# Altium PCB Stethoscope.PcbDoc
Units mm, origin at the board's own origin, x right, y up, seen from the top; angles counter-clockwise.
Board outline 100 x 84.5 mm, 2 copper layers (Top Layer, Bottom Layer); 74 components, 66 nets, 381 pads, 111 vias.
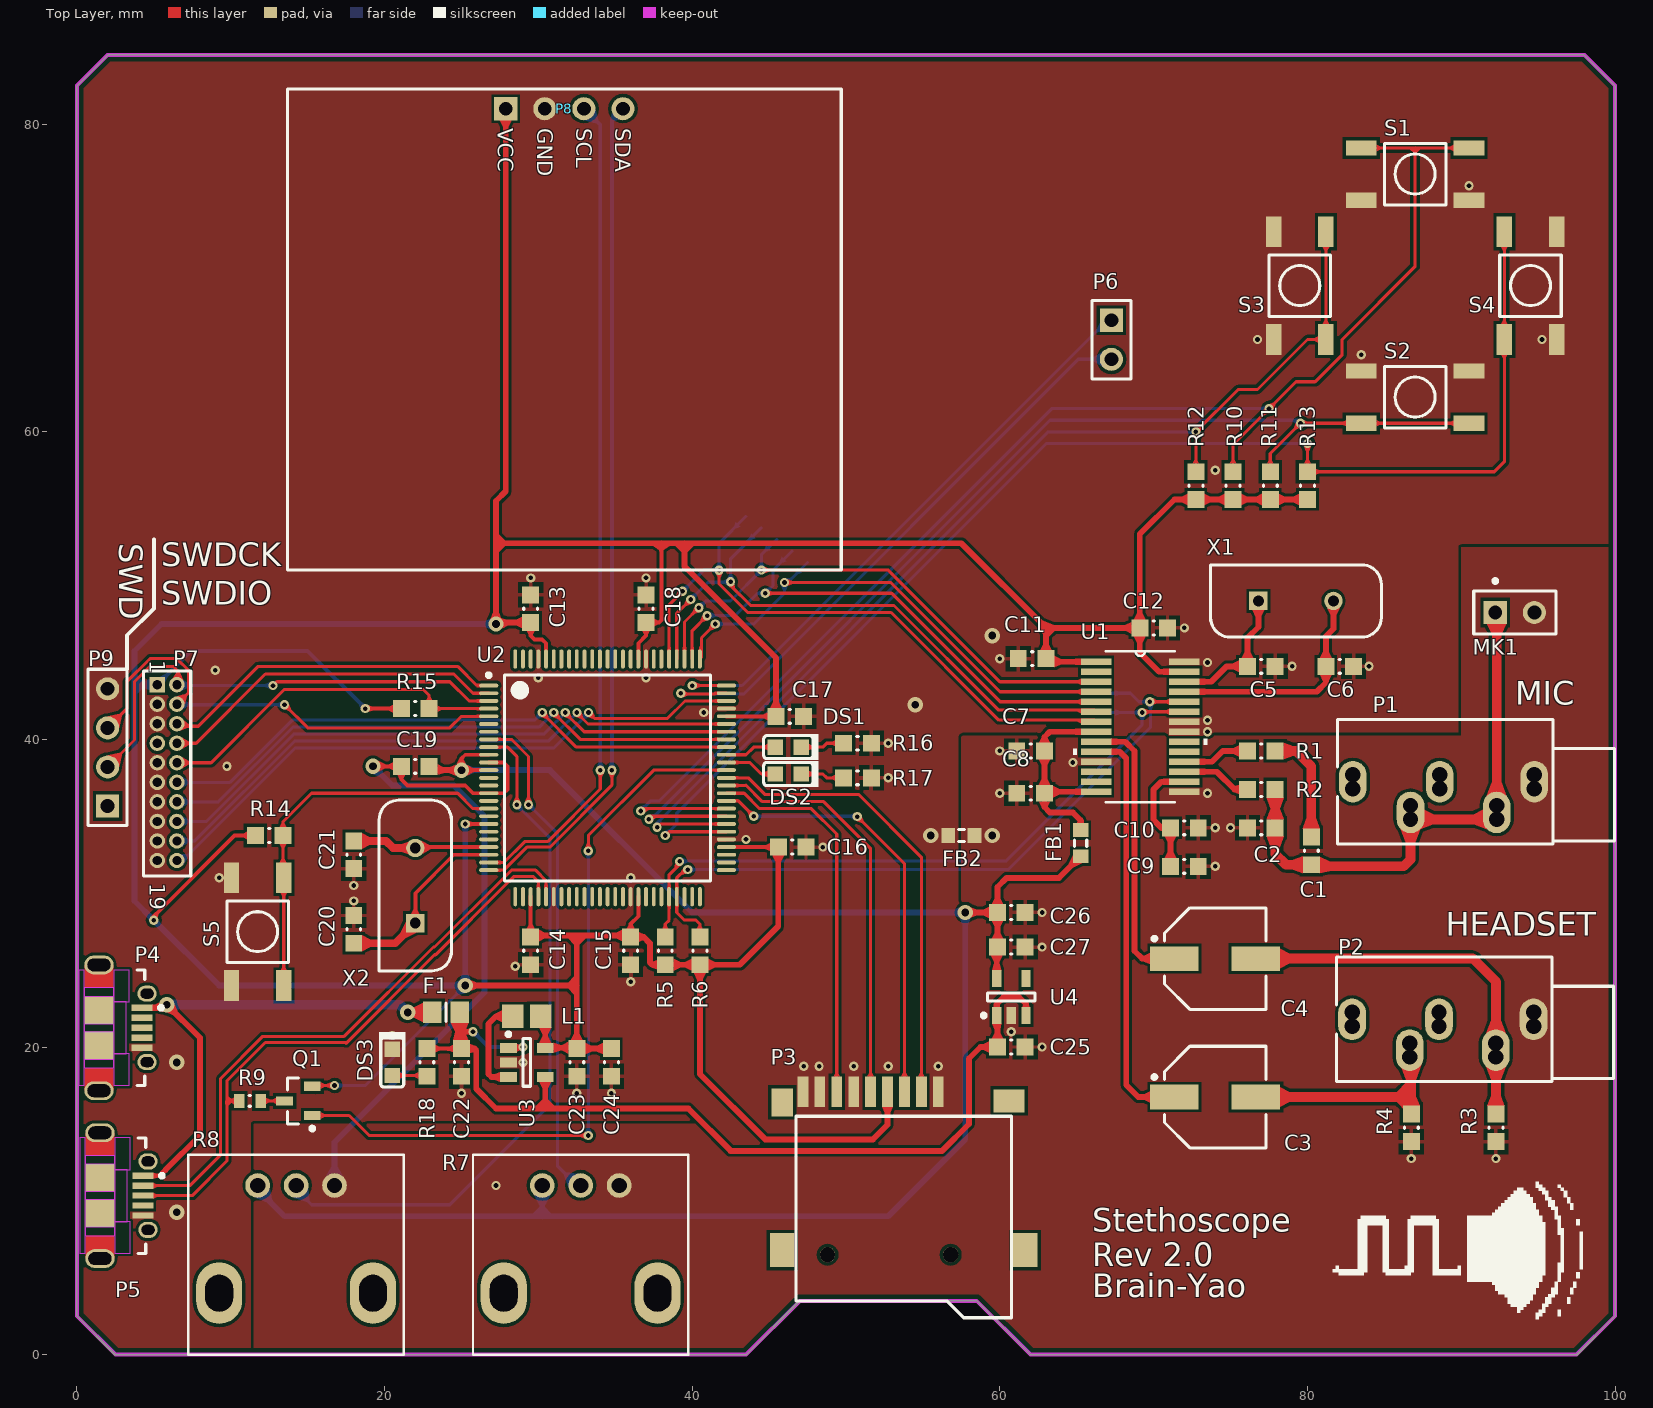
[diagram p0: Top Layer view]
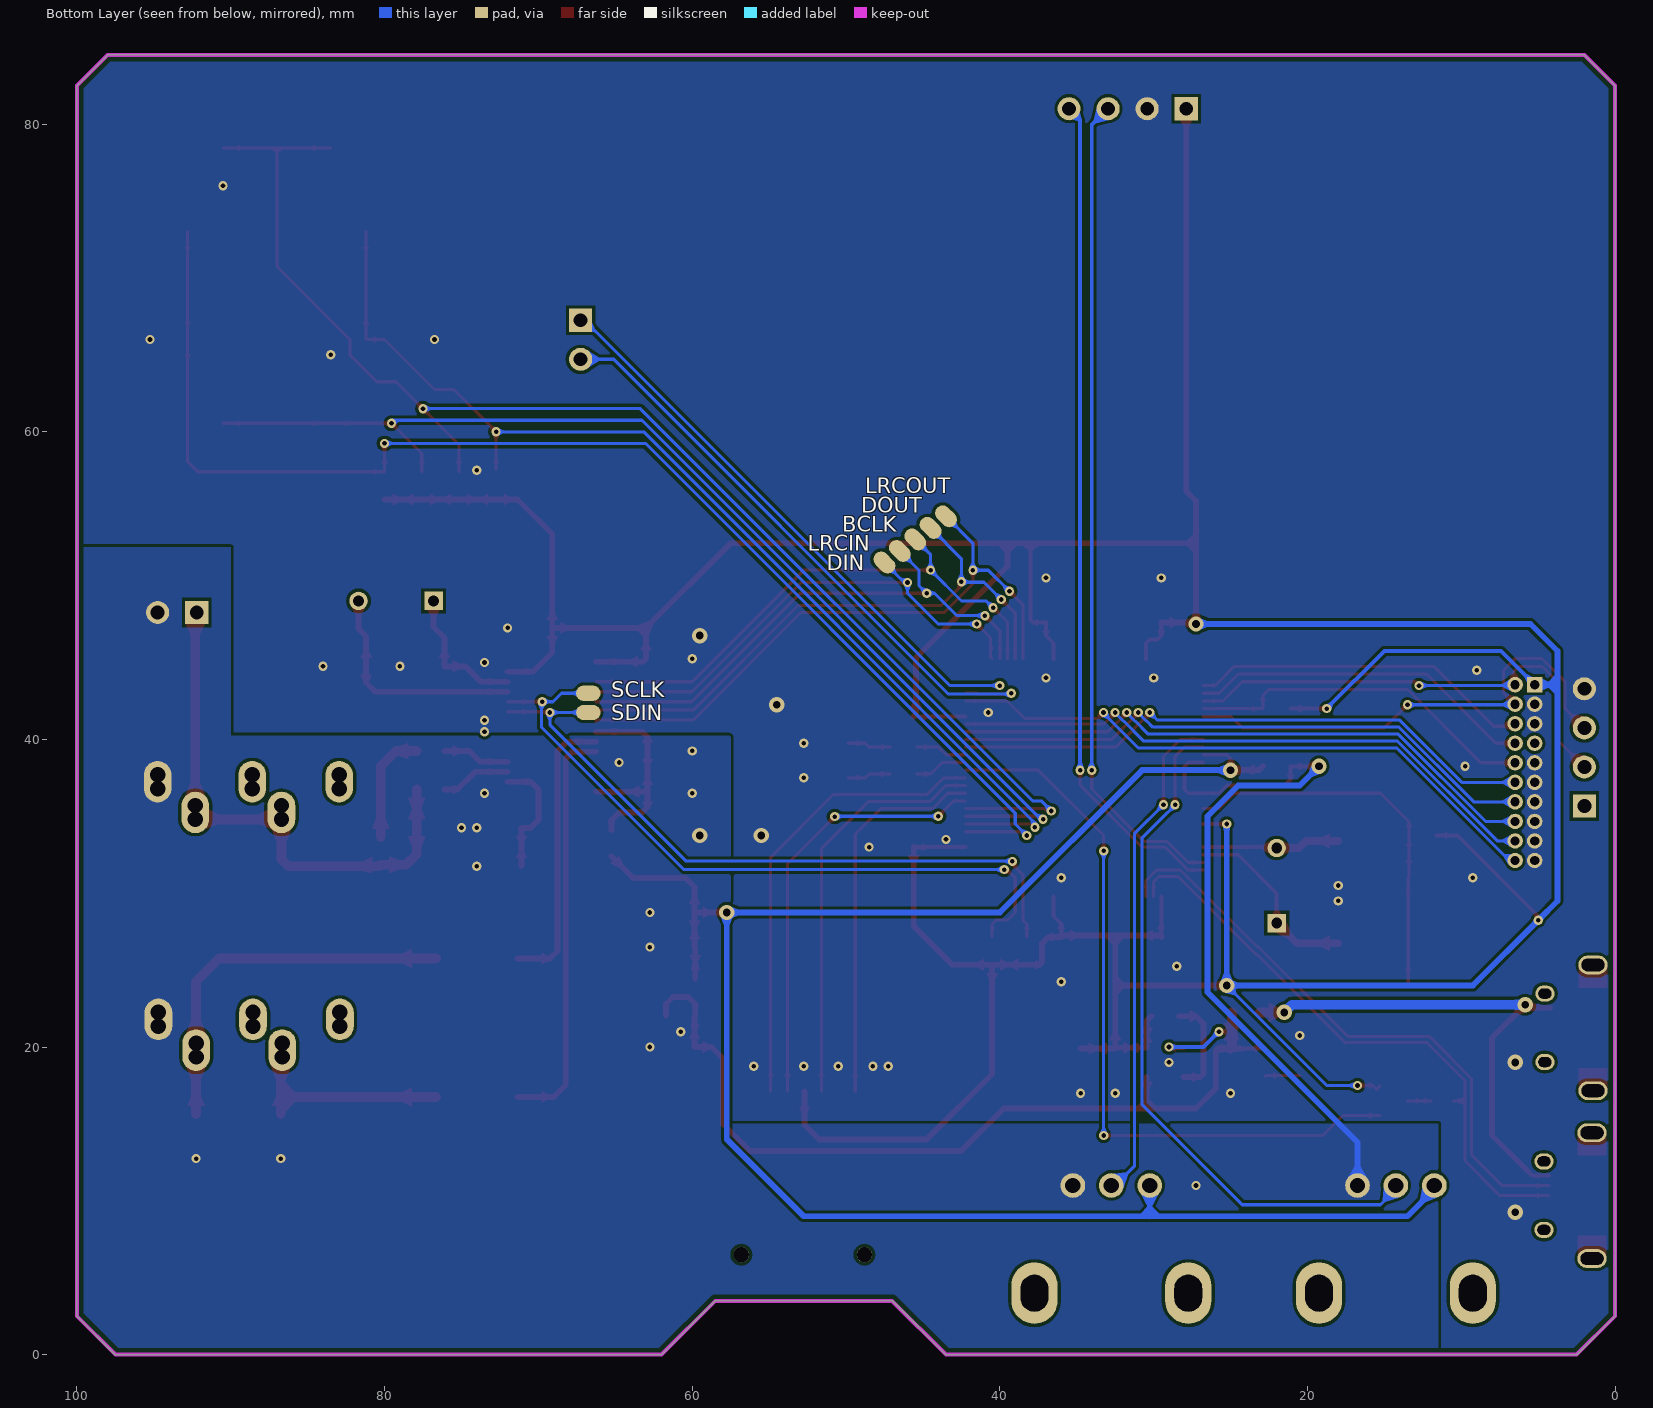
[diagram p1: Bottom Layer view, seen from below]

## Layer stack, top to bottom
Top Solder: solder mask 0.0102, Solder Resist, Dk 3.5
Top Layer: signal copper 0.0356
Dielectric 1: dielectric 0.32, FR-4, Dk 4.8
Bottom Layer: signal copper 0.0356
Bottom Solder: solder mask 0.0102, Solder Resist, Dk 3.5

## Board outline
0,2.5 2.5,0 43.5,0 47,3.5 58.5,3.5 62,0 97.5,0 100,2.5 100,82.5 98,84.5 2,84.5 0,82.5

## Design rules (kind name [scope] priority, off if disabled: settings)
Clearance Clearance_Edge [OnLayer('Keep-Out Layer')] p1: gap=0.3
Clearance Clearance_Poly [InPolygon] p2: gap=0.2
Clearance [All] p3: gap=0.152
DiffPairsRouting [All] p1: maxlimit=0.381 minlimit=0.152 mostfreqgap=0.2 toplayer_minwidth=0.2 toplayer_maxwidth=0.381 toplayer_prefwidth=0.3 bottomlayer_minwidth=0.2 bottomlayer_maxwidth=0.381 bottomlayer_prefwidth=0.3 maxuncoupledlength=12.7
HoleSize [All] p1: absolutevalues=TRUE maxlimit=6.5 minlimit=0.3 maxpercent=80.000 minpercent=20.000
HoleToHoleClearance [All] p1: gap=0.152 allowstackedmicrovias=TRUE
MinimumSolderMaskSliver [All] p1: minsoldermaskwidth=0.1
PolygonConnect PolygonConnect_2 [IsVia] p1: connectstyle=Direct reliefconductorwidth=0.254 reliefentries=4 polygonreliefangle="90 Angle" airgapwidth=0.254
PolygonConnect PolygonConnect_1 [(HasFootprint('CAPC0603(1608)100_M') OR HasFootprint('RESC0603(1608)_M'))] p2: connectstyle=Relief reliefconductorwidth=0.254 reliefentries=4 polygonreliefangle="90 Angle" airgapwidth=0.254
PolygonConnect [All] p3: connectstyle=Direct reliefconductorwidth=0.254 reliefentries=4 polygonreliefangle="90 Angle" airgapwidth=0.254
RoomDefinition Codec [InComponentClass('Codec')] p1: confinementstyle=ConfineIn formatcopy=TRUE lockcomponents=FALSE outline 45.5,-9 58.5,-9 58.5,-2 45.5,-2
RoomDefinition Power [InComponentClass('Power')] p2: confinementstyle=ConfineIn formatcopy=TRUE lockcomponents=FALSE outline 59.75,-9.099 68.542,-9.099 68.542,-2.5 59.75,-2.5
RoomDefinition MCU [InComponentClass('MCU')] p3: confinementstyle=ConfineIn formatcopy=TRUE lockcomponents=FALSE outline 33.5,-10.75 44,-10.75 44,-1.75 33.5,-1.75
RoutingVias [All] p1: holewidth=0.3 width=0.6 viastyle="Through Hole" minholewidth=0.3 minwidth=0.6 maxholewidth=0.6 maxwidth=1.2
SilkToSolderMaskClearance [IsPad] p1: minsilkscreentomaskgap=0.152 clearancetoexposedcopper=TRUE
SolderMaskExpansion [All] p1: expansion=0.102
Width [All] p1: maxlimit=1.5 minlimit=0.152 preferedwidth=0.254
25 further rules are at their usual default settings.

## Classes and differential pairs
component class Power: C22 C23 C24 C25 C26 C27 DS3 FB2 L1 R18 U3 U4
component class MCU: C13 C14 C15 C16 C17 C18 C19 C20 C21 DS1 DS2 F1 P3 P4 P6 P7 P8 P9 Q1 R5 R6 R7 R8 R10 R11 R12 R13 R14 R15 R16 R17 R18 S1 S2 S3 S4 S5 U2 X2
component class Codec: C1 C2 C3 C4 C5 C6 C7 C8 C9 C10 C11 C12 FB1 MK1 P1 P2 R1 R2 R3 R4 U1 X1
differential pair USB: +USB_P -USB_N

## Components (designator, comment, footprint, x,y, rotation, side; value= is the part's Value field where it differs from the comment)
C1 "1uF 16V" CAPC0603(1608)100_M 80.25,32.75 r90 top
C2 "47pF 16V" CAPC0603(1608)100_M 77,34.25 r0 top
C3 "100uF 16V" HONOR_63X54 74,16.75 r0 top
C4 "100uF 16V" HONOR_63X54 74,25.75 r0 top
C5 "20pF 16V" CAPC0603(1608)100_M 77,44.75 r180 top
C6 "20pF 16V" CAPC0603(1608)100_M 82.1,44.75 r180 top
C7 "100nF 16V" CAPC0603(1608)100_M 62,39.25 r0 top
C8 "100nF 16V" CAPC0603(1608)100_M 62,36.5 r0 top
C9 "100nF 16V" CAPC0603(1608)100_M 72,31.75 r180 top
C10 "10uF 6.3V" CAPC0603(1608)100_M 72,34.25 r180 top
C11 "100nF 16V" CAPC0603(1608)100_M 62.1,45.25 r0 top
C12 "100nF 16V" CAPC0603(1608)100_M 70,47.25 r180 top
C13 "100nF" CAPC0603(1608)100_M 29.5,48.5 r270 top
C14 "100nF" CAPC0603(1608)100_M 29.5,26.25 r90 top
C15 "100nF" CAPC0603(1608)100_M 36,26.25 r90 top
C16 "100nF" CAPC0603(1608)100_M 46.5,33 r180 top
C17 "100nF" CAPC0603(1608)100_M 46.35,41.5 r180 top
C18 "100nF" CAPC0603(1608)100_M 37,48.5 r270 top
C19 "100nF" CAPC0603(1608)100_M 22,38.25 r0 top
C20 "30pF 10V" CAPC0603(1608)100_M 18,27.65 r270 top
C21 "30pF 10V" CAPC0603(1608)100_M 18,32.5 r90 top
C22 "10uF 10V" CAPC0603(1608)100_M 25,19 r90 top
C23 "10uF 10V" CAPC0603(1608)100_M 32.5,19 r90 top
C24 "100nF 16V" CAPC0603(1608)100_M 34.75,19 r90 top
C25 "10uF 10V" CAPC0603(1608)100_M 60.75,20 r180 top
C26 "10uF 10V" CAPC0603(1608)100_M 60.75,28.75 r180 top
C27 "100nF 16V" CAPC0603(1608)100_M 60.75,26.5 r180 top
DS1 "LED" KING-0603LED_GREEN_V 46.25,39.5 r180 top
DS2 "LED" KING-0603LED_ORANGE_V 46.25,37.75 r180 top
DS3 "LED" KING-0603LED_GREEN_V 20.5,19 r270 top
F1 "Polysilicon fuse" RESC2012N 24,22.25 r0 top
FB1 "120R@100MHz" RESC1608N 65.25,33.25 r270 top
FB2 "120R@100MHz" RESC1608N 57.5,33.754 r180 top
L1 "3.3uH" INDC2012N 29.25,22 r0 top
MK1 "Mic2" PIN2 92.21,48.25 r0 top
P1 "MIC" ST-3150-5N 99.95,36.4 r270 top
P2 "EarPhone" ST-3150-5N 99.9,20.95 r270 top
P3 "TF-Card" Micro_TF_01A 53.75,6.5 r270 top
P4 "Micro USB" HIRO-ZX62D-AB-5P8_V 3,21.25 r270 top
P5 "Micro USB" HIRO-ZX62D-AB-5P8_V 3.062,10.338 r270 top
P6 "Header 2" HDR1X2 67.25,67.25 r270 top
P7 "MHDR2X10" MHDR2X10 5.23,43.56 r270 top
P8 "OLED" OLED 31.69,81 r0 top
P9 "Header 4" HDR1X4 2,35.67 r90 top
Q1 "BSS84" NXP-SOT23_L 14.4,16.5 r180 top
R1 "0" RESC0603(1608)_M 77,39.25 r180 top
R2 "2K2 1%" RESC0603(1608)_M 77,36.75 r180 top
R3 "100K 1%" RESC0603(1608)_M 92.25,14.75 r90 top
R4 "100K 1%" RESC0603(1608)_M 86.75,14.75 r90 top
R5 "2K2 5%" RESC0603(1608)_M 38.25,26.25 r270 top
R6 "2K2 5%" RESC0603(1608)_M 40.5,26.25 r270 top
R7 "RPot" R09 32.75,4 r180 top
R8 "RPot" R09 14.25,4 r180 top
R9 "1K5 5%" RESC0603(1608)_L 11.25,16.5 r180 top
R10 "10K 1%" RESC0603(1608)_M 75.167,56.5 r270 top
R11 "10K 1%" RESC0603(1608)_M 77.583,56.5 r270 top
R12 "10K 1%" RESC0603(1608)_M 72.75,56.5 r270 top
R13 "10K 1%" RESC0603(1608)_M 80,56.5 r270 top
R14 "10K 5%" RESC0603(1608)_M 12.5,33.75 r180 top
R15 "10K 5%" RESC0603(1608)_M 22,42 r180 top
R16 "47R 5%" RESC0603(1608)_M 50.75,39.75 r180 top
R17 "47R 5%" RESC0603(1608)_M 50.75,37.5 r180 top
R18 "100R 5%" RESC0603(1608)_M 22.75,19 r90 top
S1 "SW-PB" 4x4_switch 87,76.75 r180 top
S2 "SW-PB" 4x4_switch 87,62.25 r0 top
S3 "SW-PB" 4x4_switch 79.5,69.5 r90 top
S4 "SW-PB" 4x4_switch 94.5,69.5 r270 top
S5 "SW-PB" 4x4_switch 11.75,27.5 r270 top
U1 "TLV320AIC23B" PW28 69.13,40.825 r0 top
U2 "LPC1768FBD100" SOT407-1_L 34.5,37.5 r0 top
U3 "RT8008-33" SOT23-5AN 29.25,19 r0 top
U4 "TPS76333DBVRG4" TI-DBV5_N 60.75,23.25 r90 top
X1 "12.288MHz ±20ppm 20pF" 49S 79.25,49 r180 top
X2 "12M" 49S 22,30.5 r270 top

## Footprints (in the part's own frame and the unit in brackets; to place one, negate y for a bottom-side part, rotate by r counter-clockwise, add the part's x,y. Pads: shape width x height; smd on the part's side, far side on the other; paste and mask are expansions set on the pad)
4x4_switch [mm] "4x4_switch"
  rect 2x1 smd: 1(-3.5,1.7) 1(3.5,1.7) 2(-3.5,-1.7) 2(3.5,-1.7)
  silkscreen extent -2,-2 2,2, body extent -2,-2 2,2, height 2
49S [mm]
  rect 1.2x1.2 hole 0.7: 1(2.44,0)
  round 1.2 hole 0.7: 2(-2.44,0)
  silkscreen extent -5.55,-2.35 5.55,2.35
CAPC0603(1608)100_M [mm] "Chip Capacitor, Body 1.6x0.8mm, Height 1.0mm, IPC Low Density"
  rect 1.1x1.1 smd: 1(-0.9,0) 2(0.9,0)
  silkscreen extent -0.05,-0.45 0.05,0.45, body extent -0.87,-0.47 0.88,0.48, height 1
HDR1X2 [mm] "Connector; Header; 2 Position"
  rect 1.5x1.5 hole 0.9: 1(0,0)
  round 1.5 hole 0.9: 2(2.54,0)
  silkscreen extent -1.27,-1.27 3.81,1.27
HDR1X4 [mm] "Connector; Header; 4 Position"
  rect 1.5x1.5 hole 0.9: 1(0,0)
  round 1.5 hole 0.9: 2(2.54,0) 3(5.08,0) 4(7.62,0)
  silkscreen extent -1.27,-1.27 8.89,1.27
HIRO-ZX62D-AB-5P8_V [mm] "USB Micro-AB Connector, 5-Leads, Pitch 0.65mm"
  rect 0.4x1.35 smd: 1(-1.3,1.238) 2(-0.65,1.238) 3(0,1.238) 4(0.65,1.238) 5(1.3,1.238)
  oval 1.05x1.25 hole 0.65 slot 0.85 at 90 deg: 6(2.225,1.563) 11(-2.225,1.563)
  oval 1.225x1.9 hole 0.825 slot 1.5 at 90 deg: 7(4.088,-1.562) 10(-4.088,-1.562)
  rect 1.8x1.9 smd: 8(1.15,-1.562) 9(-1.15,-1.562)
  Top Layer region: -4.088,-2.513 -2.6,-2.513 -2.6,-0.613 -4.088,-0.613
  Top Layer region: 2.6,-2.512 4.088,-2.512 4.088,-0.612 2.6,-0.612
  Top Layer keep-out region: 2.59,-0.602 2.06,-0.602 2.06,-2.522 2.59,-2.522
  Top Layer keep-out region: -0.24,-2.522 0.24,-2.522 0.24,-0.602 -0.24,-0.602
  Top Layer keep-out region: -2.59,-2.522 -2.06,-2.522 -2.06,-0.602 -2.59,-0.602
  Top Layer keep-out region: -3.75,-2.887 3.75,-2.887 3.75,-2.523 -3.75,-2.523
  Top Layer keep-out region: 1.7,-0.603 3.75,-0.603 3.75,0.413 1.7,0.413
  Top Layer keep-out region: -1.7,-0.602 1.7,-0.602 1.7,0.213 -1.7,0.213
  Top Layer keep-out region: -3.75,-0.602 -1.7,-0.602 -1.7,0.413 -3.75,0.413
  silkscreen extent -3.75,0.91 3.75,2.59, body extent -4.37,-4.19 4.37,1.86, height 2.83
HONOR_63X54 [mm]
  rect 3.15x1.6 smd: 1(-2.65,0) 2(2.65,0)
  silkscreen extent -4.07,-3.3 3.3,3.3
INDC2012N [mm] "Chip Inductor, Body 2.0x1.2mm, IPC Medium Density"
  rect 1.4x1.5 smd: 1(-0.9,0) 2(0.9,0)
  body extent -1.1,-0.7 1.1,0.7, height 1.1
KING-0603LED_GREEN_V [mm] "SMT LED, 2-Leads, Body 1.6x0.8mm (0603-Size)"
  rect 1x1 smd paste+0 mask+0: 1(0.85,0) 2(-0.85,0)
  silkscreen extent -1.97,-0.85 1.6,0.85, body extent -0.92,-0.53 1.09,0.53, height 1.1
KING-0603LED_ORANGE_V [mm] "SMT LED, 2-Leads, Body 1.6x0.8mm (0603-Size)"
  rect 1x1 smd paste+0 mask+0: 1(0.85,0) 2(-0.85,0)
  silkscreen extent -1.97,-0.85 1.6,0.85, body extent -0.92,-0.53 1.09,0.53, height 1.1
MHDR2X10 [mm] "Connector; Header; 10x2 Position"
  rect 1x1 hole 0.6: 1(0,0)
  round 1 hole 0.6: 2(0,1.27) 3(1.27,0) 4(1.27,1.27) 5(2.54,0) 6(2.54,1.27) 7(3.81,0) 8(3.81,1.27) 9(5.08,0) 10(5.08,1.27) 11(6.35,0) 12(6.35,1.27) 13(7.62,0) 14(7.62,1.27) 15(8.89,0) 16(8.89,1.27) 17(10.16,0) 18(10.16,1.27) 19(11.43,0) 20(11.43,1.27)
  silkscreen extent -0.9,-0.9 12.43,2.17
Micro_TF_01A [mm]
  rect 1.5x2 smd: 0(-10,6.85)
  rect 1.8x1.4 smd: 0(-9.9,-7.9)
  rect 2.2x1.6 smd: 0(-0.3,7.9) 0(-0.3,-7.9)
  round 1 hole 1 unplated: 0(0,3.05) 0(0,-4.95)
  rect 2x0.7 smd: 1(-10.6,2.25) 2(-10.6,1.15) 3(-10.6,0.05) 4(-10.6,-1.05) 5(-10.6,-2.15) 6(-10.6,-3.25) 7(-10.6,-4.35) 8(-10.6,-5.45) 9(-10.6,-6.55)
  silkscreen extent -9,-7 4.1,7, body extent -11.11,-8.15 6.45,8.15, height 2.04
NXP-SOT23_L [mm] "SOT23, 3-Leads, Body 3x1.4mm, Pitch 0.95mm, IPC High Density"
  rect 1.1x0.6 smd: 1(-0.9,0.95) 2(-0.9,-0.95) 3(0.9,0)
  silkscreen extent -1.03,-1.5 0.7,1.92, body extent -0.7,-1.5 0.7,1.5, height 1.1
OLED [mm]
  rect 1.5x1.5 hole 0.9: 1(-3.81,0)
  round 1.5 hole 0.9: 2(-1.27,0) 3(1.27,0) 4(3.81,0)
  silkscreen extent -18,-30 18,1.27
PIN2 [mm] "Photosensitive Diode; 2 Leads"
  rect 1.5x1.5 hole 0.9: 1(0,0)
  round 1.5 hole 0.9: 2(2.54,0)
  silkscreen extent -1.4,-1.4 3.94,2.17
PW28 [mil]
  rect 78x16 smd: 1(-113,166.34) 2(-113,140.75) 3(-113,115.16) 4(-113,89.57) 5(-113,63.98) 6(-113,38.39) 7(-113,12.8) 8(-113,-12.8) 9(-113,-38.39) 10(-113,-63.98) 11(-113,-89.57) 12(-113,-115.16) 13(-113,-140.75) 14(-113,-166.34) 15(113,-166.34) 16(113,-140.75) 17(113,-115.16) 18(113,-89.57) 19(113,-63.98) 20(113,-38.39) 21(113,-12.8) 22(113,12.8) 23(113,38.39) 24(113,63.98) 25(113,89.57) 26(113,115.16) 27(113,140.75) 28(113,166.34)
  silkscreen extent -172,-193 172,193
R09 [mm] "R -09 Insulated Shaft Rotary Potentiometer"
  oval 3x4 hole 1.8 slot 2.4 at 90 deg: 0(-5,0) 0(5,0)
  round 1.6 hole 1: 1(-2.5,-7) 2(2.5,-7) 3(0,-7)
  silkscreen extent -7,-9 7,4, body extent -5,-7 5,3, height 21.8
RESC0603(1608)_L [mm] "Chip Resistor, Body 1.6x0.8mm, IPC High Density"
  rect 0.7x0.9 smd: 1(-0.7,0) 2(0.7,0)
  silkscreen extent -0.05,-0.35 0.05,0.35, body extent -0.85,-0.47 0.85,0.47, height 0.6
RESC0603(1608)_M [mm] "Chip Resistor, Body 1.6x0.8mm, IPC Low Density"
  rect 1.1x1.1 smd: 1(-0.9,0) 2(0.9,0)
  silkscreen extent -0.05,-0.45 0.05,0.45, body extent -0.85,-0.47 0.85,0.47, height 0.6
RESC1608N [mm] "Chip Resistor, Body 1.6x0.8mm, IPC Medium Density"
  rect 0.9x1 smd: 1(-0.85,0) 2(0.85,0)
  silkscreen extent -0.2,-0.4 0.2,0.4, body extent -0.8,-0.4 0.8,0.4, height 0.6
RESC2012N [mm] "Chip Resistor, Body 2.0x1.3mm, IPC Medium Density"
  rect 1.2x1.4 smd: 1(-0.9,0) 2(0.9,0)
  silkscreen extent 0,-0.6 0,0.6, body extent -1,-0.6 1,0.6, height 0.95
SOT23-5AN [mm] "SOT23, 5-Leads, Body 2.9x1.6mm, Pitch 0.95mm, Lead Span 2.8mm, IPC Medium Density"
  rect 1.1x0.65 smd: 1(-1.2,0.95) 2(-1.2,0) 3(-1.2,-0.95) 4(1.2,-0.95) 5(1.2,0.95)
  silkscreen extent -1.32,-1.55 0.25,1.95, body extent -0.9,-1.55 0.9,1.55, height 1.45
SOT407-1_L [mm] "Thin QFP, 100-Leads, Body 14x14mm, Pitch 0.5mm, IPC High Density"
  oval 1.25x0.25 smd: 1(-7.725,6) 2(-7.725,5.5) 3(-7.725,5) 4(-7.725,4.5) 5(-7.725,4) 6(-7.725,3.5) 7(-7.725,3) 8(-7.725,2.5) 9(-7.725,2) 10(-7.725,1.5) 11(-7.725,1) 12(-7.725,0.5) 13(-7.725,0) 14(-7.725,-0.5) 15(-7.725,-1) 16(-7.725,-1.5) 17(-7.725,-2) 18(-7.725,-2.5) 19(-7.725,-3) 20(-7.725,-3.5) 21(-7.725,-4) 22(-7.725,-4.5) 23(-7.725,-5) 24(-7.725,-5.5) 25(-7.725,-6) 51(7.725,-6) 52(7.725,-5.5) 53(7.725,-5) 54(7.725,-4.5) 55(7.725,-4) 56(7.725,-3.5) 57(7.725,-3) 58(7.725,-2.5) 59(7.725,-2) 60(7.725,-1.5) 61(7.725,-1) 62(7.725,-0.5) 63(7.725,0) 64(7.725,0.5) 65(7.725,1) 66(7.725,1.5) 67(7.725,2) 68(7.725,2.5) 69(7.725,3) 70(7.725,3.5) 71(7.725,4) 72(7.725,4.5) 73(7.725,5) 74(7.725,5.5) 75(7.725,6)
  oval 0.25x1.25 smd: 26(-6,-7.725) 27(-5.5,-7.725) 28(-5,-7.725) 29(-4.5,-7.725) 30(-4,-7.725) 31(-3.5,-7.725) 32(-3,-7.725) 33(-2.5,-7.725) 34(-2,-7.725) 35(-1.5,-7.725) 36(-1,-7.725) 37(-0.5,-7.725) 38(0,-7.725) 39(0.5,-7.725) 40(1,-7.725) 41(1.5,-7.725) 42(2,-7.725) 43(2.5,-7.725) 44(3,-7.725) 45(3.5,-7.725) 46(4,-7.725) 47(4.5,-7.725) 48(5,-7.725) 49(5.5,-7.725) 50(6,-7.725) 76(6,7.725) 77(5.5,7.725) 78(5,7.725) 79(4.5,7.725) 80(4,7.725) 81(3.5,7.725) 82(3,7.725) 83(2.5,7.725) 84(2,7.725) 85(1.5,7.725) 86(1,7.725) 87(0.5,7.725) 88(0,7.725) 89(-0.5,7.725) 90(-1,7.725) 91(-1.5,7.725) 92(-2,7.725) 93(-2.5,7.725) 94(-3,7.725) 95(-3.5,7.725) 96(-4,7.725) 97(-4.5,7.725) 98(-5,7.725) 99(-5.5,7.725) 100(-6,7.725)
  silkscreen extent -7.85,-6.7 6.7,6.8, body extent -7,-7 7,7, height 1.6
ST-3150-5N [mm] "Connector; Stereo Jack, 3.5mm, 5 Position"
  oval 2.7x1.8 all layers, no hole: 1(-0.85,-5.2) 2(1.15,-7.65) 3(-0.85,-11.35) 4(1.15,-13.25) 5(-0.85,-17)
  round 1.2 hole 1: 1A(-1.3,-5.2) 1B(-0.4,-5.2) 2A(0.7,-7.65) 2B(1.6,-7.65) 3A(-1.3,-11.35) 3B(-0.4,-11.35) 4A(0.7,-13.25) 4B(1.6,-13.25) 5A(-1.3,-17) 5B(-0.4,-17)
  silkscreen extent -4.9,-18 3.2,0
TI-DBV5_N [mm] "SOT23, 5-Leads, Body 2.9x1.6mm, Pitch 0.95mm, IPC Medium Density"
  rect 1.1x0.6 smd: 1(-1.2,0.95) 2(-1.2,0) 3(-1.2,-0.95) 4(1.2,-0.95) 5(1.2,0.95)
  silkscreen extent -1.32,-1.55 0.25,1.92, body extent -0.87,-1.52 0.87,1.53, height 1.45

## Part data
C1: library part CMP-1035-02736-1, "CAP 1uF 16V ±5% 0603 (1608 Metric) Thickness 1mm SMD"
C2: library part CMP-1035-01051-1, "CAP 47pF 16V ±5% 0603 (1608 Metric) Thickness 1mm SMD"
C3 C4: library part "Cap Pol1", "Polarized Capacitor (Radial)"
C5 C6: library part CMP-1035-00768-1, "CAP 20pF 16V ±0.25pF 0603 (1608 Metric) Thickness 1mm SMD"
C7 C8 C9 C11 C12 C13 C14 C15 C16 C17 C18 C19 C24 C27: library part CMP-1035-02584-1, "CAP 100nF 16V ±10% 0603 (1608 Metric) Thickness 1mm SMD"
C10: library part CMP-1035-02796-1, "CAP 10uF 6.3V ±10% 0603 (1608 Metric) Thickness 1mm SMD"
C20 C21: library part CMP-1035-00901-1, "CAP 30pF 10V ±2% 0603 (1608 Metric) Thickness 1mm SMD"
C22 C23 C25 C26: library part CMP-1035-02799-1, "CAP 10uF 10V ±10% 0603 (1608 Metric) Thickness 1mm SMD"
DS1 DS3: library part CMP-0404-00001-1, "LED, SMT, 0603(1608), 1.1mm thickness, Green"
DS2: library part CMP-0404-00002-1, "LED, SMT, 0603(1608), 1.1mm thickness, Orange"
F1: library part "Fuse 2", "Polysilicon fuse 50mA"
FB1 FB2: library part Res2, "Resistor"
L1: library part Inductor, "Inductor"
MK1: "Microphone"
P1 P2: library part "Phonejack Stereo SW", "3-Conductor Jack with 2 break contacts (normals) and 2 auxiliary make contacts"
P4 P5: library part CMP-1349-00001-1, "USB 2.0 Standard Micro-USB Connector, Micro AB-Standard (Bottom Mount), 30 V AC, -30 to 85 degC, Right Angle, 5-Pin 7.5 x 5.6 x 2.8 mm SMD, RoHS, Reel"
P6: "Header, 2-Pin"
P7: "Header, 10-Pin, Dual row"
P8: library part "Header 4", "Header, 4-Pin"
P9: "Header, 4-Pin"
Q1: library part CMP-1258-00128-1, "P-Channel Enhancement Mode Vertical DMOS Transistor, -50 V, -0.13 A, 3-Pin SOT23, Tape and Reel"
R1: library part CMP-1012-00001-1, "Jumper 0603 (1608 Metric)"
R2: library part CMP-1012-00546-1, "2K2 0.1W 1% 0603 (1608 Metric)  SMD"
R3 R4: library part CMP-1012-00736-1, "100K 0.1W 1% 0603 (1608 Metric)  SMD"
R5 R6: library part CMP-1012-00082-1, "2K2 0.1W 5% 0603 (1608 Metric)  SMD"
R7 R8: "Potentiometer"
R9: library part CMP-1012-00078-1, "1K5 0.1W 5% 0603 (1608 Metric)  SMD"
R10 R11 R12 R13: library part CMP-1012-00623-1, "10K 0.1W 1% 0603 (1608 Metric)  SMD"
R14 R15: library part CMP-1012-00098-1, "10K 0.1W 5% 0603 (1608 Metric)  SMD"
R16 R17: library part CMP-1012-00042-1, "47R 0.1W 5% 0603 (1608 Metric)  SMD"
R18: library part CMP-1012-00050-1, "100R 0.1W 5% 0603 (1608 Metric)  SMD"
S1 S2 S3 S4 S5: "Switch"
U1: "Imported"
U2: library part CMP-0174-00010-4, "Cortex-M3, 32-Bit ARM MCU, 512 kB flash, 64 kB SRAM, Ethernet, USB 2.0 Device/Host/OTG, 12-Bit ADC, DAC, I2S, 100-Pin LQFP"
U3: library part RT8008, "RT8008"
U4: library part CMP-0394-00568-1, "Single Output LDO, 150 mA, Fixed 3.3 V Output, 2.7 to 10 V Input, with Low IQ, 5-pin SOT-23 (DBV), -40 to 125 degC, Green (RoHS & no Sb/Br)"
X1 X2: library part XTAL, "Crystal Oscillator"

## Free pads (board coordinates)
  oval 1x1.6 smd far side rot 135 paste+0 mask+0: 0(43.5,54.5) 1(44.5,53.75) 2(45.5,53) 3(46.5,52.25) 4(47.5,51.5)
  oval 1.6x1 smd far side paste+0 mask+0: 0(66.75,41.75) 0(66.75,43)

## Via types
v1: diameter 0.6, hole 0.3, Top Layer to Bottom Layer, tented both sides, 98 vias
v2: diameter 1, hole 0.5, Top Layer to Bottom Layer, tented both sides, 13 vias

## Nets (pads, with @x,y where several pads share a name; then routed paths per layer and width w, separated by ;. In a path a pad name is that pad's centre, name@x,y a point inside that pad or via, vN(x,y) a via of type N, cw(c..) or ccw(c..) an arc to the next point about the centre after c; other vN are vias at no path point)
+3V3: C11.2 C12.2 C13.2 C14.2 C15.2 C16.2 C17.2 C18.2 C23.2 C24.2 L1.2 P3.4 P7.1 P8.1 Q1.2 R5.2 R6.2 R10.2 R11.2 R12.2 R13.2 R14.2 R15.2 U1.1 U1.27 U2.19 U2.28 U2.42 U2.54 U2.71 U2.84 U2.96 U3.5 | length 332.5
  Top Layer w0.203: Q1.2 15.5,17.25 15.75,17.5 v1(16.75,17.5)
  Top Layer w0.254: v1(5,28.25) 5,28.5 10.25,33.75 R14.2 ; v1(18.75,42) R15.2 ; v1(25.25,34.5) U2.19 ; C14.2 U2.28 ; C13.2 29.5,46.75 29.75,46.5 30.25,46.5 30.5,46.25 U2.96 ; C15.2 36,28 36.5,28.5 U2.42 ; U2.84 36.5,46.25 37,46.75 C18.2 37.85,47.6 38,47.75 38,52.75 ; U2.54 C16.2 ; U2.71 C17.2
  Top Layer w0.381: v2(25.25,24) 32.5,24 ; P8.1 27.88,56.13 27.25,55.5 27.25,52.75 ; C14.2 29.6,27.25 32.5,27.25 ; C13.2 27.35,47.6 v2(27.25,47.5) 27.25,52.75 ; L1.2 30.45,21.7 U3.5 32.45,19.95 C23.2 ; C24.2 C23.2 ; C16.2 45.6,27.85 43.1,25.35 R6.2 ; C17.2@45.6,41.5 45.45,41.65 45.45,45.3 39.5,51.25 39.5,52.75 ; P3.4 52.7,14.95 51.75,14 44.75,14 40.5,18.25 R6.2 ; U1.1 63.2,45.05 C11.2 63,47.25 ; U1.27 70.35,44.4 69.1,45.65 C12.2 ; R13.2 R11.2 R10.2 R12.2 71.35,55.6 69.1,53.35 C12.2 ; 27.25,52.75 38,52.75 39.5,52.75 ; C23.2 32.5,24 ; 32.5,24 32.5,27.25 ; 32.5,27.25 35.9,27.25 C15.2 36.85,27.15 37.25,26.75 37.25,25.5 37.4,25.35 R5.2 R6.2 ; 39.5,52.75 57.5,52.75 63,47.25 ; 63,47.25 C12.2
  Bottom Layer w0.203: v1(16.75,17.5) 18.75,17.5 v2(25.25,24)
  Bottom Layer w0.254: P7.1 7.42,45.75 15,45.75 v1(18.75,42)
  Bottom Layer w0.381: P7.1 3.75,43.56 ; v1(25.25,34.5) v2(25.25,24) 9.25,24 v1(5,28.25) 3.75,29.5 3.75,43.56 ; v2(27.25,47.5) 5.5,47.5 3.75,45.75 3.75,43.56
+3V3A: C19.2 C26.2 C27.2 FB1.2 R7.2 R8.2 U2.10 U2.12 U4.5 | length 123.3
  Top Layer w0.254: U2.12 v2(25,38) 25,38.75 25.25,39 U2.10
  Top Layer w0.381: C19.2 23.15,38 v2(25,38) ; v2(57.75,28.75) C26.2 ; U4.5 59.8,26.45 C27.2 C26.2 ; FB1.2 63.85,31 60.45,31 59.85,30.4 C26.2
  Bottom Layer w0.381: R8.2 11.75,10.75 13.5,9 30.25,9 ; v2(25,38) 30.75,38 40,28.75 v2(57.75,28.75) 57.75,14 52.75,9 30.25,9 ; R7.2 30.25,9
+5V: C22.2 C25.2 F1.2 R18.2 U3.1 U3.4 U4.1 U4.3 | length 62.4
  Top Layer w0.254: R18.2 C22.2 ; 24.9,21 v1(25.75,21) ; U3.1 28.95,19.95 v1(29,20)
  Top Layer w0.381: C22.2 25.85,19.9 25.967,19.783 25.967,17.283 27.25,16 30.45,16 ; U3.4 30.45,16 ; U4.3 61.7,22.8 61.25,23.25 60.25,23.25 59.8,22.8 U4.1 59.85,22 C25.2 58.75,20 58,19.25 58,15 56.25,13.25 42.5,13.25 39.75,16 30.45,16
  Top Layer w0.635: F1.2 24.9,21 24.9,20 C22.2
  Bottom Layer w0.254: v1(25.75,21) 26.75,20 v1(29,20)
AGND: C2.1 C7.1 C8.1 C9.1 C10.1 C19.1 C25.1 C26.1 C27.1 FB2.1 MK1.2 P1.1 P1.1A P1.1B P2.1 P2.1A P2.1B R3.1 R4.1 R7.1 R8.1 U1.11 U1.15 U2.11 U2.15 U4.2 | length 49.5
  Top Layer w0.254: v2(19.25,38.25) C19.1 21.1,37.4 21.5,37 25.25,37 25.75,36.5 U2.15 27.75,36.5 28,36.75 28,38.25 27.75,38.5 U2.11
  Bottom Layer w0.381: R8.1 16.75,13.814 26.5,23.564 26.5,35 24.5,37 20.5,37 v2(19.25,38.25)
  other v1: 27.25,11 86.75,12.75 92.25,12.75 62.75,20 60.75,21 62.75,26.5 62.75,28.75 74,31.75 74,34.25 75,34.25 60,36.5 73.5,36.5 64.75,38.5 60,39.25
  other v2: 59.5,33.75
AIN_1: R8.3 U2.9 | length 45.5
  Top Layer w0.203: U2.9 28,39.5 28.606,38.894 v1(28.606,35.75)
  Bottom Layer w0.203: R8.3 14.25,10.75 15.25,9.75 24.25,9.75 30.75,16.25 30.75,33.606 29.16,35.196 29.129,35.196 28.606,35.719 v1(28.606,35.75)
AIN_2: R7.3 U2.8 | length 32.5
  Top Layer w0.203: U2.8 28.25,40 29.358,38.892 v1(29.358,35.75)
  Bottom Layer w0.203: v1(29.358,35.75) 31.25,33.858 31.25,12.25 32.5,11 R7.3
AVDD: C7.2 C8.2 FB1.1 U1.8 U1.14 | length 14.8
  Top Layer w0.381: FB1.1 65.25,34.75 64.75,35.25 63.25,35.25 62.9,35.6 C8.2 ; U1.14 63,36.6 C8.2 ; U1.8 63.25,40.5 62.9,40.15 C7.2 C8.2
DGND: C5.1 C6.1 C11.1 C12.1 C13.1 C14.1 C15.1 C16.1 C17.1 C18.1 C20.1 C21.1 C22.1 C23.1 C24.1 DS3.2 FB2.2 P3.1 P3.6 P3.8 P3.9 P4.5 P5.5 P7.3 P7.5 P7.9 P7.11 P7.13 P7.15 P7.17 P7.19 P8.2 P9.4 R16.1 R17.1 S1.1 S2.1 S3.1 S4.1 S5.2 U1.21 U1.22 U1.28 U2.31 U2.41 U2.55 U2.72 U2.83 U2.97 U3.2
  other v1: 25,17 32.5,17 34.75,17 47.25,18.75 48.25,18.75 50.5,18.75 52.75,18.75 56,18.75 29,19 20.5,20.75 36,24.25 28.5,25.25 18,29.5 18,30.5 9.25,31 36,31 48.5,33 43.5,33.5 52.75,37.5 9.75,38.25 52.75,39.75 73.5,40.5 73.5,41.25 40.75,41.75 30,44 37,44 9,44.5 79,44.75 84,44.75 73.5,45 60,45.25 72,47.25 29.5,50.5 37,50.5 74,57.5 83.5,65 76.75,66 95.25,66 90.5,76
  other v2: 6.5,9.25 6.5,19 55.5,33.75 54.5,42.25 59.5,46.75
KEY_D: R11.1 S2.2 U2.58 | length 73.2
  Top Layer w0.203: v1(37.186,34.814) 37.372,35 U2.58 ; R11.1 77.583,58.583 v1(79.55,60.55) 83.5,60.55 S2.2@90.5,60.55
  Bottom Layer w0.203: v1(37.186,34.814) 37.328,34.814 63.262,60.748 79.352,60.748 v1(79.55,60.55)
KEY_L: R12.1 S3.2 U2.57 | length 70.8
  Top Layer w0.203: v1(37.718,34.282) 37.936,34.5 U2.57 ; R12.1@72.745,57.555 v1(72.745,59.995) 75.5,62.75 76.75,62.75 80,66 81.2,66 S3.2@81.2,73
  Bottom Layer w0.203: v1(37.718,34.282) 37.718,34.563 63.151,59.995 v1(72.745,59.995)
KEY_R: R13.1 S4.2 U2.56 | length 86.7
  Top Layer w0.203: v1(38.25,33.75) 38.5,34 U2.56 ; v1(80,59.243) R13.1 92.15,57.4 92.8,58.05 92.8,66 S4.2@92.8,73
  Bottom Layer w0.203: v1(38.25,33.75) 39,34.5 39,35.204 63.039,59.243 v1(80,59.243)
KEY_U: R10.1 S1.2 U2.59 | length 91
  Top Layer w0.203: v1(36.654,35.346) 36.808,35.5 U2.59 ; R10.1 75.167,59.167 79.25,63.25 80.5,63.25 82.25,65 82.25,66 87,70.75 87,78.45 ; S1.2@83.5,78.45 87,78.45 ; S1.2@90.5,78.45 87,78.45
  Bottom Layer w0.203: v1(36.654,35.346) 37.308,36 37.874,36 63.374,61.5 v1(77.5,61.5)
NetC1_1: C1.1 C2.2 MK1.1 P1.2 P1.2A P1.2B P1.4 P1.4A P1.4B R2.1 | length 35.2
  Top Layer w0.635: R2.1 C2.2 77.9,32.55 78.6,31.85 C1.1 80.35,31.75 86.25,31.75 86.7,32.2 P1.4B P1.2B P1.2 P1.2A 92.3,48.16 MK1.1
NetC1_2: C1.2 R1.1 | length 7.4
  Top Layer w0.635: R1.1 79.25,39.25 80.25,38.25 C1.2
NetC3_1: C3.1 U1.10 | length 26.8
  Top Layer w0.381: U1.10 67.8,39.2 68.217,38.783 68.217,17.533 69,16.75 C3.1
NetC3_2: C3.2 P2.4 P2.4A P2.4B R4.2 | length 13.7
  Top Layer w0.635: C3.2 86.75,16.75 ; R4.2 86.75,16.75 ; P2.4B@86.75,19.25 86.75,16.75
NetC4_1: C4.1 U1.9 | length 18.5
  Top Layer w0.381: U1.9 68.15,39.85 68.75,39.25 68.75,26.25 69.25,25.75 C4.1
NetC4_2: C4.2 P2.2 P2.2A P2.2B R3.2 | length 24.8
  Top Layer w0.635: C4.2 90.75,25.75 92.25,24.25 P2.2A P2.2 P2.2B R3.2
NetC5_2: C5.2 U1.26 X1.1 | length 9.1
  Top Layer w0.381: U1.26 73.75,43.75 74.75,44.75 C5.2 76.1,46.6 76.81,47.31 X1.1
NetC6_2: C6.2 U1.25 X1.2 | length 15
  Top Layer w0.381: U1.25 80.6,43.1 81.2,43.7 C6.2 81.2,46.7 81.69,47.19 X1.2
NetC9_2: C9.2 C10.2 U1.16 | length 8
  Top Layer w0.381: C9.2 C10.2 70.5,34.25 70,34.75 70,36.75 70.5,37.25 U1.16
NetC20_2: C20.2 U2.23 X2.1 | length 12.3
  Top Layer w0.254: X2.1 22,30 24.5,32.5 U2.23
  Top Layer w0.508: C20.2 20.69,26.75 X2.1
NetC21_2: C21.2 U2.22 X2.2 | length 9
  Top Layer w0.254: X2.2 22.06,33 U2.22
  Top Layer w0.508: C21.2 20.1,33.4 20.56,32.94 X2.2
NetDS1_1: DS1.1 U2.66 | length 3.4
  Top Layer w0.203: U2.66 43.5,39 44,39.5 DS1.1
NetDS1_2: DS1.2 R16.2 | length 2.9
  Top Layer w0.203: DS1.2 48.5,39.5 48.75,39.75 R16.2
NetDS2_1: DS2.1 U2.65 | length 3.5
  Top Layer w0.203: U2.65 43.75,38.5 44.5,37.75 DS2.1
NetDS2_2: DS2.2 R17.2 | length 2.9
  Top Layer w0.203: DS2.2 48.5,37.75 48.75,37.5 R17.2
NetDS3_1: DS3.1 R18.1 | length 2.3
  Top Layer w0.203: DS3.1 22.7,18.15 R18.1
NetF1_1: F1.1 P4.1 P5.1 | length 33.3
  Top Layer w0.254: P5.1 5.388,11.638 5.75,12
  Top Layer w0.381: P4.1 5.65,22.55 v2(5.85,22.75) 8,20.6 8,14.25 5.75,12
  Top Layer w0.635: v2(21.5,22.25) F1.1
  Bottom Layer w0.635: v2(5.85,22.75) 21,22.75 v2(21.5,22.25)
NetL1_1: L1.1 U3.3 | length 6.4
  Top Layer w0.381: U3.3 26.95,18.05 26.75,18.25 26.75,21.5 27.25,22 L1.1
NetP1_3: P1.3 P1.3A P1.3B
NetP1_5: P1.5 P1.5A P1.5B
NetP2_3: P2.3 P2.3A P2.3B
NetP2_5: P2.5 P2.5A P2.5B
NetQ1_3: Q1.3 R9.1 | length 1.6
  Top Layer w0.203: R9.1 Q1.3
NetR1_2: R1.2 U1.18 | length 4.4
  Top Layer w0.381: U1.18 73.8,38.55 74.5,39.25 R1.2
NetR2_2: R2.2 U1.17 | length 4.6
  Top Layer w0.381: U1.17 74.1,37.9 75.25,36.75 R2.2
NetR14_1: R14.1 S5.1 U2.17 | length 25.2
  Top Layer w0.203: S5.1@13.45,24 13.45,31 13.4,31.05 R14.1 13.4,34.65 15.25,36.5 24.75,36.5 25.75,35.5 U2.17
OLED_SCL: P8.3 U2.24 | length 53.9
  Top Layer w0.203: U2.24 27.75,32 29.106,33.356 30.606,33.356 34.027,36.777 v1(34.027,38)
  Bottom Layer w0.254: P8.3 34.027,79.933 v1(34.027,38)
OLED_SDA: P8.4 U2.25 | length 54.6
  Top Layer w0.203: U2.25 27.753,31.5 29.253,33 30.753,33 34.781,37.028 v1(34.781,38)
  Bottom Layer w0.254: v1(34.781,38) 34.781,80.281 P8.4
RXD: P6.2 U2.74 | length 40.1
  Top Layer w0.203: v1(39.25,43) 39.304,42.946 41.444,42.946 41.498,43 U2.74
  Bottom Layer w0.203: v1(39.25,43) 39.304,42.946 43.337,42.946 65.101,64.71 P6.2
SDCLK: P3.5 U2.62 | length 26.9
  Top Layer w0.203: U2.62 43.485,37 43.5,37.015 44.562,35.953 48.547,35.953 51.6,32.9 P3.5
SDCS: P3.2 U2.63 | length 30.1
  Top Layer w0.203: U2.63 43.656,37.5 44.75,36.406 50.844,36.406 54.9,32.35 P3.2
SDMISO: P3.7 U2.61 | length 25
  Top Layer w0.203: U2.61 43.375,36.5 44.375,35.5 47.75,35.5 49.4,33.85 P3.7
SDMOSI: P3.3 U2.60 | length 28.1
  Top Layer w0.203: U2.60 43,36 v1(44,35) ; v1(50.733,34.983) 53.8,31.917 P3.3
  Bottom Layer w0.203: v1(44,35) 50.717,35 v1(50.733,34.983)
SWDCLK/TCK: P7.4 P9.3 U2.5 | length 32.2
  Top Layer w0.203: P9.3 3.25,42 3.25,43.75 4.75,45.25 6.5,45.25 7.254,44.496 7.254,43.044 P7.4 ; v1(13.5,42.25) 15,40.75 24.25,40.75 25,41.5 U2.5
  Bottom Layer w0.203: P7.4 6.54,42.25 v1(13.5,42.25)
SWDIO/TMS: P7.2 P9.2 U2.3 | length 31.8
  Top Layer w0.203: P9.2 3.75,39.96 3.75,43.747 4.753,44.75 6.25,44.75 6.603,44.397 6.603,43.767 6.81,43.56 P7.2 ; v1(12.75,43.5) 13,43.75 24.25,43.75 25.5,42.5 U2.3
  Bottom Layer w0.203: P7.2 6.56,43.5 v1(12.75,43.5)
SWO/TDO: P7.6 U2.1 | length 22.5
  Top Layer w0.203: P7.6 6.666,40.854 7.896,40.854 11.793,44.75 24.75,44.75 26,43.5 U2.1
TDI: P7.8 U2.2 | length 22.7
  Top Layer w0.203: P7.8 7.75,39.75 12.25,44.25 24.5,44.25 25.75,43 U2.2
TLV_BCLK: pad.2 U1.3 U2.78 | length 36
  Top Layer w0.203: U2.78 39.5,47.628 v1(40.436,48.564) ; v1(44.5,51.005) 52.745,51.005 60,43.75 U1.3
  Bottom Layer w0.203: v1(40.436,48.564) 40.872,49 42.495,49 v1(44.5,51.005) 44.5,52 pad.2
TLV_DIN: pad.4 U1.4 U2.76 | length 34
  Top Layer w0.203: U2.76 40.602,45.327 40.602,46.602 v1(41.5,47.5) ; v1(46,50.203) 52.906,50.203 60.009,43.1 U1.4
  Bottom Layer w0.203: v1(41.5,47.5) 44,47.5 46,49.5 v1(46,50.203) 46.203,50.203 pad.4
TLV_DOUT: pad.1 U1.6 U2.79 | length 39.1
  Top Layer w0.203: U2.79 39,48.192 v1(39.904,49.096) ; v1(42.5,50.25) 42.5,50 43.797,48.703 53.124,48.703 59.926,41.902 66.158,41.902 U1.6
  Bottom Layer w0.203: v1(39.904,49.096) 41.027,50.219 42.5,50.219 v1(42.5,50.25) 42.5,51.75 pad.1
TLV_LRCIN: pad.3 U1.5 U2.77 | length 35.5
  Top Layer w0.203: U2.77 40,47.064 v1(40.968,48.032) ; v1(44.75,49.5) 52.968,49.5 60.018,42.45 U1.5
  Bottom Layer w0.203: v1(40.968,48.032) 40.99,48.054 42.804,48.054 44.25,49.5 v1(44.75,49.5) 45.25,50 45.25,51 pad.3
TLV_LRCOUT: pad.0@43.5,54.5 U1.7 U2.80 | length 41
  Top Layer w0.203: U2.80 38.5,48.756 v1(39.372,49.628) ; v1(41.75,51) 41.75,50.114 41.748,50.111 43.609,48.25 52.936,48.25 59.935,41.252 66.158,41.252 U1.7
  Bottom Layer w0.203: v1(39.372,49.628) 40.744,51 v1(41.75,51) 41.75,52.75 pad.0@43.5,54.5
TLV_SCLK: pad.0@66.75,43 R6.1 U1.24 U2.47 | length 46.9
  Top Layer w0.203: v1(39.714,31.536) 39.536,31.536 39,31 U2.47 39,28.75 39.5,28.25 40.25,28.25 40.5,28 R6.1 ; v1(69.75,42.45) U1.24
  Bottom Layer w0.203: v1(39.714,31.536) 60.536,31.536 69.804,40.804 69.804,42.396 v1(69.75,42.45) 69.05,42.45 68.5,43 pad.0@66.75,43
TLV_SDIN: pad.0@66.75,41.75 R5.1 U1.23 U2.46 | length 45.2
  Top Layer w0.203: R5.1 38.25,28 38.5,28.25 U2.46 38.5,31.207 39.182,31.889 v1(39.182,32.068) ; v1(69.25,41.75) 69.2,41.8 U1.23
  Bottom Layer w0.203: v1(39.182,32.068) 39.204,32.09 60.383,32.09 69.25,40.957 v1(69.25,41.75) pad.0@66.75,41.75
TRACECLK: P7.12 U2.67 | length 38.6
  Top Layer w0.203: v1(30.25,41.75) 30.25,41.719 32.469,39.5 U2.67
  Bottom Layer w0.203: P7.12 9.96,37.21 14,41.25 29.75,41.25 v1(30.25,41.75)
TRACEDATA_0: P7.14 U2.68 | length 38.9
  Top Layer w0.203: v1(31.002,41.75) 31.002,41.719 32.721,40 U2.68
  Bottom Layer w0.203: P7.14 9.193,35.94 14.05,40.797 30.049,40.797 30.448,41.196 30.479,41.196 30.804,41.521 30.804,41.552 v1(31.002,41.75)
TRACEDATA_1: P7.16 U2.69 | length 39.2
  Top Layer w0.203: v1(31.755,41.75) 31.755,41.719 32.974,40.5 U2.69
  Bottom Layer w0.203: P7.16 8.426,34.67 14.099,40.344 30.348,40.344 31.201,41.196 31.232,41.196 31.556,41.521 31.556,41.552 v1(31.755,41.75)
TRACEDATA_2: P7.18 U2.70 | length 39.5
  Top Layer w0.203: v1(32.507,41.75) 32.507,41.719 33.226,41 U2.70
  Bottom Layer w0.203: P7.18 7.659,33.4 14.149,39.89 30.648,39.89 31.953,41.196 31.984,41.196 32.309,41.521 32.309,41.552 v1(32.507,41.75)
TRACEDATA_3: P7.20 U2.73 | length 40.4
  Top Layer w0.203: v1(33.26,41.75) 33.654,41.356 38.389,41.356 39.533,42.5 U2.73
  Bottom Layer w0.203: P7.20 6.892,32.13 14.199,39.437 31.001,39.437 33.26,41.696 v1(33.26,41.75)
TRST: P7.10 R15.1 U2.4 | length 23.3
  Top Layer w0.203: P7.10 8.73,38.48 13.5,43.25 22.5,43.25 22.9,42.85 R15.1 U2.4
TXD: P6.1 U2.75 | length 39.3
  Top Layer w0.203: v1(40,43.5) 41.498,43.5 U2.75
  Bottom Layer w0.203: v1(40,43.5) 43.25,43.5 67,67.25 P6.1
USB_CON: Q1.1 U2.64 | length 48.7
  Top Layer w0.203: Q1.1 17.7,15.55 19,14.25 v1(33.25,14.25) ; v1(33.25,32.75) 33.25,33.75 37.5,38 U2.64
  Bottom Layer w0.203: v1(33.25,14.25) v1(33.25,32.75)
USB_N: P5.2 U2.30 | length 38.9
  Top Layer w0.203: P5.2 7.334,10.987 9.347,13 9.347,17.959 12.083,20.695 17.375,20.695 23.18,26.5 23.25,26.5 27.894,31.144 27.9,31.144 28.256,31.5 29.82,31.5 30.5,30.82 U2.30
USB_P: P5.3 R9.2 U2.29 | length 39.3
  Top Layer w0.203: P5.3 7.5,10.338 9.75,12.588 9.75,16.5 ; R9.2 9.75,16.5 ; U2.29 30,30.75 29.653,31.097 28.423,31.097 28.067,30.741 28.061,30.741 23.32,26 23.25,26 17.5,20.25 17.458,20.292 12.25,20.292 9.75,17.792 9.75,16.5
pads on no net: P3.0 P4.2 P4.3 P4.4 P4.6 P4.7 P4.8 P4.9 P4.10 P4.11 P5.4 P5.6 P5.7 P5.8 P5.9 P5.10 P5.11 P7.7 P9.1 R7.0 R8.0 U1.2 U1.12 U1.13 U1.19 U1.20 U2.6 U2.7 U2.13 U2.14 U2.16 U2.18 U2.20 U2.21 U2.26 U2.27 U2.32 U2.33 U2.34 U2.35 U2.36 U2.37 U2.38 U2.39 U2.40 U2.43 U2.44 U2.45 U2.48 U2.49 U2.50 U2.51 U2.52 U2.53 U2.81 U2.82 U2.85 U2.86 U2.87 U2.88 U2.89 U2.90 U2.91 U2.92 U2.93 U2.94 U2.95 U2.98 U2.99 U2.100 U4.4

## Polygon pours and split planes (outlines as drawn)
DGND on Top Layer "Top-DGND" (solid, remove dead copper, pour order 17): 0,0 100,0 100,84.5 0,84.5
AGND on Top Layer "Top-AGND" (solid, remove dead copper, pour order 16): 11.5,15 11.5,0 100,0 100,52.5 90,52.5 90,40.25 57.5,40.25 57.5,15
DGND on Bottom Layer "Bot-DGND" (solid, remove dead copper, pour order 19): 0,0 100,0 100,84.5 0,84.5
AGND on Bottom Layer "Bot-AGND" (solid, remove dead copper, pour order 18): 11.5,15 11.5,0 100,0 100,52.5 90,52.5 90,40.25 57.5,40.25 57.5,15

## Keep-outs
Keep-Out Layer:
  the board outline again, w0.254

## Silkscreen, mask and mechanical layers (free items; w line width, h text height)
Top Overlay:
  drawing of 15 lines, arcs and shapes, not listed
  text "SWD" at 2.75,52.75 h1.52 r270
  text "SWDCK" at 5.5,51.25 h1.52
  text "SWDIO" at 5.5,48.75 h1.52
  text "MIC" at 93.5,42.25 h1.52
  text "HEADSET" at 89,27.25 h1.52
  text "Stethoscope" at 66,8 h1.52
  text "Rev 2.0" at 66,5.75 h1.52
  text "Brain-Yao" at 66,3.75 h1.52
Bottom Overlay:
  text "LRCOUT" at 48.75,56 h1
  text "DOUT" at 49,54.75 h1
  text "BCLK" at 50.25,53.5 h1
  text "LRCIN" at 52.5,52.25 h1
  text "DIN" at 51.25,51 h1
  text "SCLK" at 65.25,42.75 h1
  text "SDIN" at 65.25,41.25 h1
Drill Drawing:
  text ".Legend" at 104.75,14.5 h1.52

## Text inside footprints (layer, text, board x,y; h text height)
C3: Mechanical 1 "C1" at 73.463,16.3 h0.75
C4: Mechanical 1 "C1" at 73.463,25.3 h0.75
P1: Mechanical 1 "Mech 2 - Clearance, move to internal plane if present" at 100.324,43.626 h0.3 r270; Mechanical 1 "Mech 1 - Slot cut-out" at 100.824,43.626 h0.3 r270; Mechanical 1 "Assign keep-out area to slot" at 102.324,43.626 h0.3 r270; Mechanical 1 "Slot 1x1.9mm, PTH" at 101.324,43.626 h0.3 r270; Mechanical 1 "Alert PCB fab to slot details" at 101.824,43.626 h0.3 r270
P2: Mechanical 1 "Mech 2 - Clearance, move to internal plane if present" at 100.274,28.176 h0.3 r270; Mechanical 1 "Mech 1 - Slot cut-out" at 100.774,28.176 h0.3 r270; Mechanical 1 "Slot 1x1.9mm, PTH" at 101.274,28.176 h0.3 r270; Mechanical 1 "Alert PCB fab to slot details" at 101.774,28.176 h0.3 r270; Mechanical 1 "Assign keep-out area to slot" at 102.274,28.176 h0.3 r270
P4: Mechanical 3 "board edge" at 0.079,28.362 h0.2 r270
P5: Mechanical 3 "board edge" at 0.141,17.45 h0.2 r270
P7: Top Overlay "1" at 4.722,45.16 h1 r270; Top Overlay "19" at 4.722,30.66 h1 r270
P8: Top Overlay "VCC" at 27.372,79.73 h1 r270; Top Overlay "GND" at 29.912,79.73 h1 r270; Top Overlay "SCL" at 32.452,79.73 h1 r270; Top Overlay "SDA" at 34.992,79.73 h1 r270